# Altium PCB Micro+Complete+Ver1.1.pcbdoc
Units mil, origin at the board's own origin, x right, y up, seen from the top; angles counter-clockwise.
Board outline 4250 x 3000 mil, 2 copper layers (Top Layer, Bottom Layer); 43 components, 58 nets, 187 pads, 94 vias.
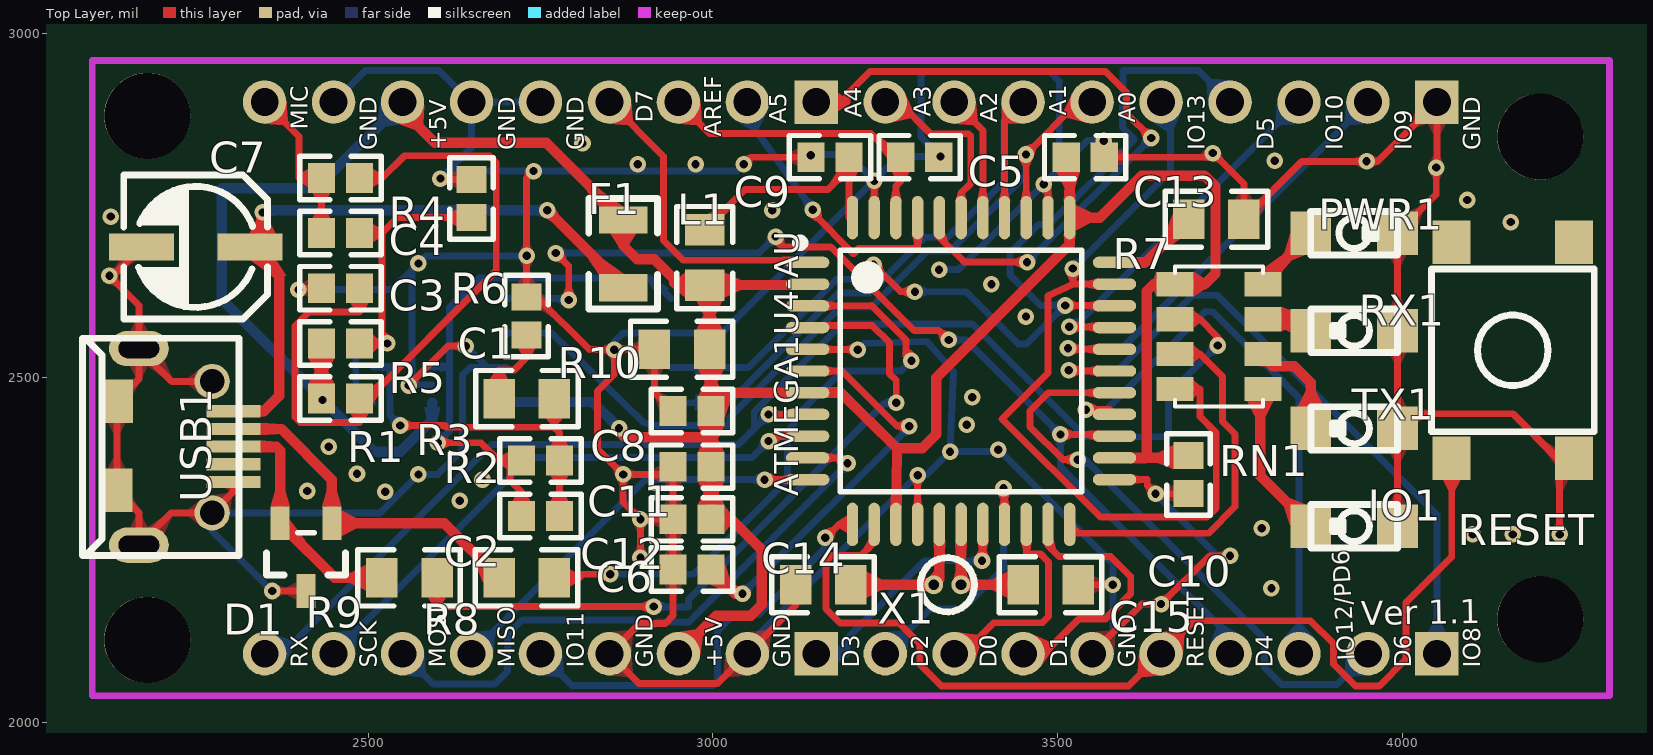
[diagram p0: Top Layer view]
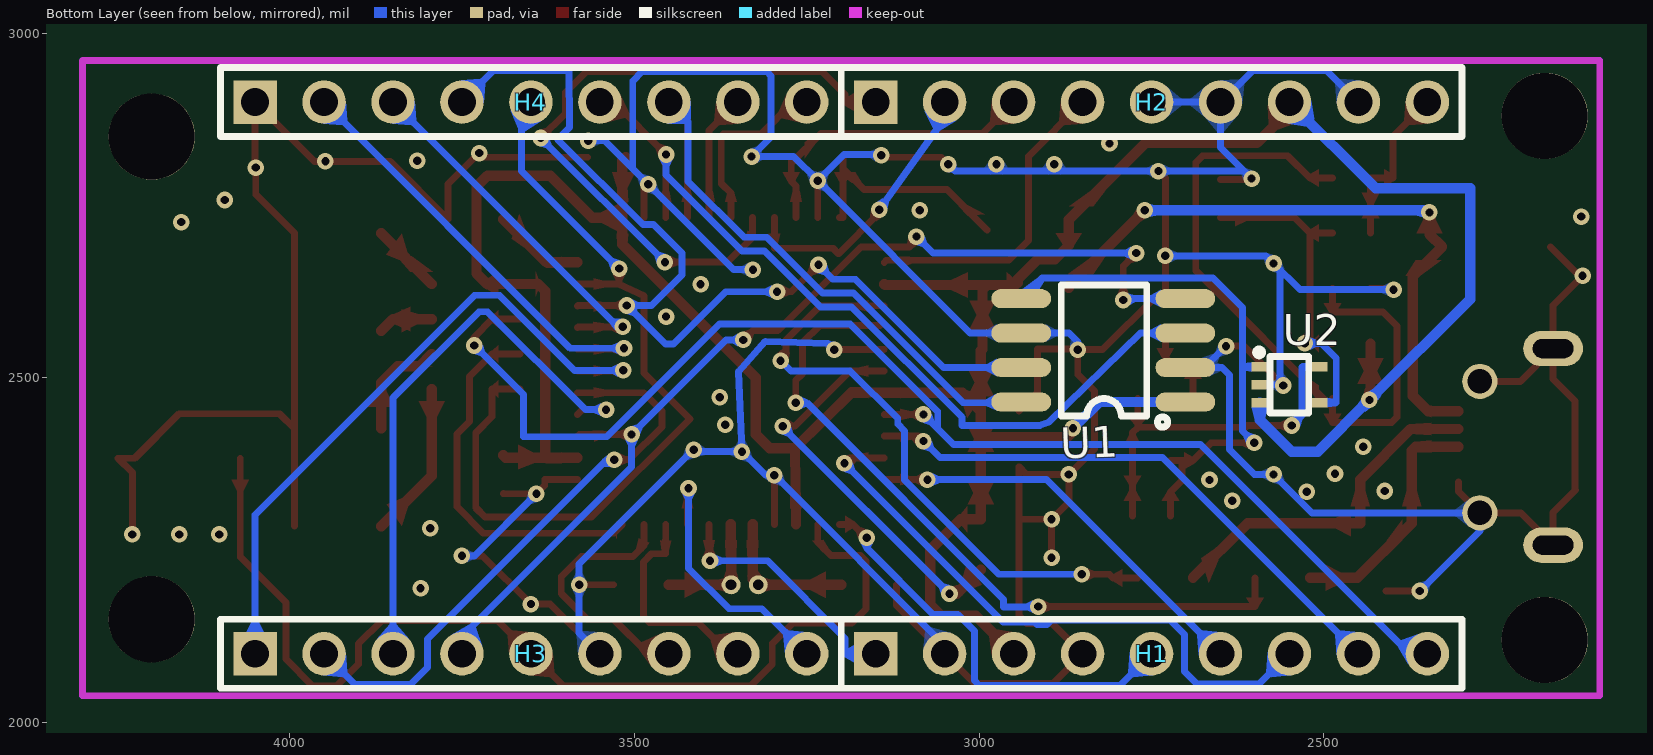
[diagram p1: Bottom Layer view, seen from below]

## Layer stack, top to bottom
Top Layer: signal copper (thickness not stored)
Dielectric: dielectric 12.6, FR-4, Dk 4.8
Bottom Layer: signal copper (thickness not stored)

## Board outline
5250,1000 1000,1000 1000,4000 5250,4000

## Components (designator, comment, footprint, x,y, rotation, side; value= is the part's Value field where it differs from the comment)
ATMEGA1U4-AU "ATMEGA32U4-AU" QFP-44_10X10X08P 3360,2510 r0 top
C1 "1uF" 0603 2730,2590 r90 top
C2 "100pF" 0603 2750,2300 r180 top
C3 "100nF" 0603 2460,2630 r0 top
C4 "10nF" 0603 2460,2710 r0 top
C5 "100nF" 0603 3300,2820 r180 top
C6 "1uF" 0603 2970,2222 r0 top
C7 "22uF" CAP-SMD_BD5.0-L5.3-W5.3-FD 2250,2690 r180 top
C8 "100nF" 0603 2970,2451.8 r0 top
C9 "1uF" 0603 3170,2820 r0 top
C10 "100nF" 0603 3690,2360 r90 top
C11 "100nF" 0603 2970,2371.2 r0 top
C12 "100nF" 0603 2970,2295 r0 top
C13 "100nF" 0603 3540,2820 r180 top
C14 "22pF" 0805 3160,2200 r0 top
C15 "22pF" 0805 3490,2200 r0 top
D1 "AZ5125-02S.R7G" SOT-23-3_L2.9-W1.6-P1.90-LS2.8-BR 2410,2240 r90 top
F1 "SMD1206P050TF/15" FUSE-1206 2870,2680 r90 top
H1 "A2541WV-9P" SIP-2.54MM-9P-CJT-H8.54 2750,2100 r180 bottom
H2 "A2541WV-9P" SIP-2.54MM-9P-CJT-H8.54 2750,2900 r180 bottom
H3 "A2541WV-9P" SIP-2.54MM-9P-CJT-H8.54 3650,2100 r180 bottom
H4 "A2541WV-9P" SIP-2.54MM-9P-CJT-H8.54 3650,2900 r180 bottom
IO1 "LTST-C21KGKT" LED-SMD-3.2X1.6X1.1 3930,2285 r180 top
L1 "30Ω" 0805 2988.31,2674.7 r90 top
PWR1 "LTST-C21TBKT" LED-SMD-3.2X1.6X1.1 3930,2710 r0 top
R1 "2K" 0603 2460,2470 r180 top
R2 "100K" 0603 2750,2380 r0 top
R3 "10K" 0805 2730,2470 r180 top
R4 "2K" 0603 2460,2790 r0 top
R5 "1M" 0603 2460,2550 r180 top
R6 "1M" 0603 2650,2760 r270 top
R7 "1K" 0805 3730,2730 r180 top
R8 "22" 0805 2730,2210 r0 top
R9 "22" 0805 2560,2210 r0 top
R10 "10K" 0805 2955.24,2541.64 r0 top
RESET "TSA063G50-250" SW-SMD-T6X6-9.5X5.8 4160,2540 r90 top
RN1 "1K" 1206_X4 3734,2560 r90 top
RX1 "LTST-C21KSKT" LED-SMD-3.2X1.6X1.1 3930,2568.39 r180 top
TX1 "LTST-C21KSKT" LED-SMD-3.2X1.6X1.1 3930,2426.69 r180 top
U1 "MSGEQ7SOIC" SOIC-8 2820,2540 r180 bottom
U2 "MAX4466EXK+T" SC-70-5 2550,2490 r90 bottom
USB1 "micro USBFemale" MICRO-USB-1 2220,2400 r180 top
X1 "16MHz" TXAL-1.9*6 3340,2200 r0 top

## Footprints (in the part's own frame and the unit in brackets; to place one, negate y for a bottom-side part, rotate by r counter-clockwise, add the part's x,y. Pads: shape width x height; smd on the part's side, far side on the other; paste and mask are expansions set on the pad)
0603 [mm]
  rect 1x1.1 smd: 1(-0.7,0) 2(0.7,0)
  silkscreen extent -1.5,-0.8 1.5,0.8
0805 [mm]
  rect 1.16x1.45 smd: 1(-1.016,0) 2(1.016,0)
  silkscreen extent -1.9,-1.03 1.87,1.04
1206_X4 [mm]
  rect 0.9x1.375 smd: 1(-1.933,-1.623) 2(-0.643,-1.623) 3(0.643,-1.623) 4(1.933,-1.623) 5(1.933,1.623) 6(0.643,1.623) 7(-0.643,1.623) 8(-1.933,1.623)
  silkscreen extent -2.58,-1.62 2.58,1.62
CAP-SMD_BD5.0-L5.3-W5.3-FD [mm]
  rect 2.4x1 smd: 1(-2,0) 2(2,0)
  silkscreen extent -2.65,-2.65 2.65,2.65
FUSE-1206 [mm]
  rect 1x1.801 smd: 1(-1.25,0) 2(1.25,0)
  silkscreen extent -2.03,-1.27 2.03,1.27
LED-SMD-3.2X1.6X1.1 [mm]
  rect 1.5x1.6 smd: 1(-1.6,0) 2(1.6,0)
  silkscreen extent -1.6,-0.8 1.6,0.8
MICRO-USB-1 [mm]
  round 1.3 hole 0.9: 0(-1.371,2.431) 0(-1.371,-2.41)
  oval 2.2x1.3 hole 0.7 slot 1.5 at 0 deg: 0(1.329,3.619) 0(1.329,-3.619)
  rect 1.2x1.6 smd: 0(2.14,-1.683) 0(2.156,1.596)
  rect 2x0.45 smd: 1(-2.156,-1.31) 2(-2.156,-0.66) 3(-2.156,-0.01) 4(-2.156,0.64) 5(-2.156,1.29)
  silkscreen extent -2.36,-4 3.4,4
QFP-44_10X10X08P [mm]
  oval 1.6x0.42 smd: 1(-5.65,4) 2(-5.65,3.2) 3(-5.65,2.4) 4(-5.65,1.6) 5(-5.65,0.8) 6(-5.65,0) 7(-5.65,-0.8) 8(-5.65,-1.6) 9(-5.65,-2.4) 10(-5.65,-3.2) 11(-5.65,-4) 23(5.65,-4) 24(5.65,-3.2) 25(5.65,-2.4) 26(5.65,-1.6) 27(5.65,-0.8) 28(5.65,0) 29(5.65,0.8) 30(5.65,1.6) 31(5.65,2.4) 32(5.65,3.2) 33(5.65,4)
  oval 0.42x1.6 smd: 12(-4,-5.65) 13(-3.2,-5.65) 14(-2.4,-5.65) 15(-1.6,-5.65) 16(-0.8,-5.65) 17(0,-5.65) 18(0.8,-5.65) 19(1.6,-5.65) 20(2.4,-5.65) 21(3.2,-5.65) 22(4,-5.65) 34(4,5.65) 35(3.2,5.65) 36(2.4,5.65) 37(1.6,5.65) 38(0.8,5.65) 39(0,5.65) 40(-0.8,5.65) 41(-1.6,5.65) 42(-2.4,5.65) 43(-3.2,5.65) 44(-4,5.65)
  silkscreen extent -6.08,-4.45 4.45,4.87
SC-70-5 [mil]
  rect 13.8x23.62 smd: 1(26,43) 2(0,43) 3(-26,43) 4(-26,-43) 5(26,-43)
  silkscreen extent -41,-28 52,49
SIP-2.54MM-9P-CJT-H8.54 [mm]
  rect 1.6x1.6 hole 1.02: 1(-10.16,0)
  round 1.6 hole 1.02: 2(-7.62,0) 3(-5.08,0) 4(-2.54,0) 5(0,0) 6(2.54,0) 7(5.08,0) 8(7.62,0) 9(10.16,0)
  silkscreen extent -11.43,-1.27 11.43,1.27
SOIC-8 [mm]
  oval 2.2x0.7 smd: 1(3.023,-1.905) 2(3.023,-0.635) 3(3.023,0.635) 4(3.023,1.905) 5(-3.023,1.905) 6(-3.023,0.635) 7(-3.023,-0.635) 8(-3.023,-1.905)
  silkscreen extent -1.55,-2.83 2.37,2.41
SOT-23-3_L2.9-W1.6-P1.90-LS2.8-BR [mm]
  rect 1.25x0.7 smd: 1(1.25,-0.95) 2(1.25,0.95) 3(-1.25,0)
  silkscreen extent -0.65,-1.46 0.9,1.46
SW-SMD-T6X6-9.5X5.8 [mm]
  rect 1.6x1.4 smd: 1(-3.975,2.249) 2(3.975,2.249) 3(-3.975,-2.249) 4(3.975,-2.249)
  silkscreen extent -3,-3 3,3
TXAL-1.9*6 [mm]
  round 0.7 hole 0.4: 1(-0.5,0) 2(0.5,0)
  silkscreen extent -1,-1 1,1

## Free pads (board coordinates)
  round 125 hole 125 unplated: ""(2180,2120) ""(2180,2880) ""(4200,2150) ""(4200,2850)

## Via types
v1: diameter 24, hole 12, Top Layer to Bottom Layer, 94 vias

## Nets (pads, with @x,y where several pads share a name; then routed paths per layer and width w, separated by ;. In a path a pad name is that pad's centre, name@x,y a point inside that pad or via, vN(x,y) a via of type N, cw(c..) or ccw(c..) an arc to the next point about the centre after c; other vN are vias at no path point)
+5V: ATMEGA1U4-AU.2 ATMEGA1U4-AU.7 ATMEGA1U4-AU.14 ATMEGA1U4-AU.24 ATMEGA1U4-AU.34 C8.2 C10.2 C11.2 C12.2 C13.2 F1.2 H1.3 H2.7 L1.1 R1.2 R5.2 R10.2 RN1.5 U1.1 U2.3 | length 4518.9
  Top Layer w15: R1.2@2432.5,2470 R5.2@2432.5,2550 ; H2.7 2550,2888 2597,2841 2758.2,2841 F1.2 2870,2692 2890,2672 2915,2672 2944,2643 2944,2638 2947.3,2634.7 L1.1 ; v1(2864,2427) 2872,2414 2997,2414 ; H1.3 3005,2155 3055,2155 3071,2171 3071,2251 3027,2295 C12.2 C11.2 C8.2@2997.5,2451.8 ; ATMEGA1U4-AU.2 3136.3,2634.7 L1.1 ; ATMEGA1U4-AU.14 3267,2398 ; C13.2 3517.5,2815 ATMEGA1U4-AU.34 ; ATMEGA1U4-AU.24 3686.5,2384 C10.2 ; 3626.1,2384 3629,2386.9 3629,2626 3639.1,2636.1 RN1.5 ; RN1.5@3666.1,2636.1 3713,2636 3729,2652 3729,2777 3713,2793 3622,2793 3561.4,2732.4 ATMEGA1U4-AU.34 ; L1.1 2995.2,2627.8 R10.2 2997.5,2539.3 C8.2@2997.5,2451.8 ; C8.2@2997.5,2451.8 3024.3,2478.5 ATMEGA1U4-AU.7 3185,2479 3267,2398 ; 3267,2398 3304,2398 3324,2418 3324,2500 3517.5,2693.5 ATMEGA1U4-AU.34
  Bottom Layer w15: H2.7 2425,2775 2288,2775 2288,2614 v1(2434,2468) 2509,2393 2547,2393 2593,2439 U2.3 ; U1.1 2826,2465 v1(2864,2427)
A0: ATMEGA1U4-AU.36 H4.6 U1.3 | length 1212.8
  Top Layer w10: ATMEGA1U4-AU.36 3454.5,2825 3529.5,2900 H4.6
  Bottom Layer w10: U1.3 2766,2565 2899,2436 2912,2431 3025,2431 3025,2443 3185,2603 3230,2603 3311,2684 3344,2684 3454,2794 v1(3454,2824)
A1: ATMEGA1U4-AU.37 H4.7 U1.8 | length 921.9
  Top Layer w10: ATMEGA1U4-AU.37 3423,2873 H4.7
  Bottom Layer w10: U1.8 2940,2464 3023.27,2464 3182.27,2623 3227.27,2623 3308.27,2704 3341.27,2704 3422,2784.73 3422,2872 H4.7
A2: ATMEGA1U4-AU.38 H4.8 | length 184.8
  Top Layer w10: H4.8 3391.5,2858.5 ATMEGA1U4-AU.38
A3: ATMEGA1U4-AU.39 H4.9 | length 270.1
  Top Layer w10: H4.9 3270,2900 3316,2854 3371,2854 3374,2851 3374,2782 3360,2768 ATMEGA1U4-AU.39 ; ATMEGA1U4-AU.39 ATMEGA1U4-AU.39@3361,2733.4
A4: ATMEGA1U4-AU.40 H2.1 | length 994.1
  Top Layer w10: H2.1 3194.6,2900 3194.6,2911.2 3228,2944.6 3569.6,2944.6 3600,2914.2 3600,2883.7 v1(3635.8,2847.9) ; ATMEGA1U4-AU.40 3328.5,2703.9 3364.6,2667.8 v1(3455.7,2667.8)
  Bottom Layer w10: v1(3455.7,2667.8) v1(3635.8,2847.9)
A5: ATMEGA1U4-AU.41 H2.2 | length 413.6
  Top Layer w10: v1(3145,2744) 3145,2739 3204,2680 3212,2688 3297,2688 ATMEGA1U4-AU.41
  Bottom Layer w10: H2.2 3062,2860 v1(3145,2744)
AREF: ATMEGA1U4-AU.42 C5.2 H2.3 | length 458.6
  Top Layer w10: H2.3 2995.3,2854.7 3229.4,2854.7 3272.5,2811.7 C5.2@3272.5,2802.6 ; ATMEGA1U4-AU.42 3265.5,2778.3 3272.5,2785.3 C5.2@3272.5,2802.6 ; C5.2@3272.5,2820 C5.2@3272.5,2802.6
AVCC: ATMEGA1U4-AU.44 C9.2 L1.2 | length 355
  Top Layer w10: L1.2 3046.6,2773 3167,2773 3197.5,2803.5 C9.2@3197.5,2820 ; C9.2 3197.6,2785.3 3197.6,2732.4 ATMEGA1U4-AU.44
D0/RX: ATMEGA1U4-AU.20 H3.8 | length 317.9
  Top Layer w10: H3.8 3363,2100 3408,2145 3478,2145 3487,2154 3487,2233 3475,2245 3455,2245 ATMEGA1U4-AU.20
D1/TXT: ATMEGA1U4-AU.21 H3.7 | length 386.5
  Top Layer w10: H3.7 3480,2100 3530,2150 3569,2150 3606,2187 3606,2212 3577,2241 3501.7,2241 3486,2256.7 ATMEGA1U4-AU.21
D2/SDA: ATMEGA1U4-AU.19 H3.9 | length 391.6
  Top Layer w10: v1(3421.5,2339.8) 3423,2338.2 ATMEGA1U4-AU.19
  Bottom Layer w10: H3.9 3315.3,2165.3 3363,2165.3 3421.5,2223.8 v1(3421.5,2339.8)
D3/SCL: ATMEGA1U4-AU.18 H1.1 | length 362.4
  Top Layer w10: v1(3390.3,2234.9) 3391.5,2236.1 ATMEGA1U4-AU.18
  Bottom Layer w10: H1.1 3194.6,2100 3194.6,2122.3 3307.2,2234.9 v1(3390.3,2234.9)
D4*: ATMEGA1U4-AU.25 H3.4 U1.4 | length 1540.5
  Top Layer w10: v1(2772,2681) 2791,2662 v1(2791,2613) ; v1(3091,2705) 3091,2700 3101,2690 3171,2690 3292,2569 3328,2569 v1(3342,2555) ; v1(3504,2418) 3579.9,2418 ATMEGA1U4-AU.25
  Bottom Layer w10: U1.4 2789,2615 v1(2791,2613) ; v1(2772,2681) 3067,2681 v1(3091,2705) ; v1(3342,2555) 3367,2555 v1(3504,2418) ; v1@3502.3,2408 3504,2409.7 v1(3504,2418) ; H3.4 3750,2125 3504,2371 v1(3504,2418)
D5*: ATMEGA1U4-AU.31 H4.4 U1.7 | length 1436.2
  Top Layer w10: v1(3233,2664) 3272,2625 v1(3293,2625) ; v1(3511,2605) 3581.9,2605 ATMEGA1U4-AU.31
  Bottom Layer w10: U1.7 3051.5,2515 3179.5,2643 3212,2643 v1(3233,2664) ; v1(3293,2625) 3367,2625 3443,2549 3455,2549 v1(3511,2605) 3475,2605 3431,2649 3431,2681 3472.51,2722.51 3487.68,2722.51 3611.16,2845.99 3594,2863.15 3594,2867 3594.7,2945.9 3704.1,2945.9 H4.4
D6*: ATMEGA1U4-AU.27 H3.2 | length 843.7
  Top Layer w10: v1(3529.1,2381.4) 3507.6,2381.4 3460,2429 3460,2452 3486.5,2478.5 ATMEGA1U4-AU.27
  Bottom Layer w10: v1(3529.1,2381.4) 3539.7,2381.4 3800,2121.1 3800,2080 3824.6,2055.4 3905.4,2055.4 H3.2
D7: ATMEGA1U4-AU.1 H2.4 | length 455.3
  Top Layer w10: H2.4 2928.6,2821.4 2928.6,2699.5 2957.4,2670.6 3134.4,2670.6 ATMEGA1U4-AU.1
D+: ATMEGA1U4-AU.4 R9.2 | length 1050.4
  Top Layer w10: R9.2 2600,2168.4 v1(2914.3,2168.4) ; ATMEGA1U4-AU.4@3143.6,2576 3231,2576 3256,2551 3256,2506 3266,2496 v1(3266,2464)
  Bottom Layer w10: v1(2914.3,2168.4) 2914.7,2168 2964.47,2168 2964.47,2178.47 3250,2464 v1(3266,2464)
D-: ATMEGA1U4-AU.3 R8.2 | length 891.2
  Top Layer w10: R8.2 2805.9,2210 2811.2,2215.2 v1(2851.2,2215.2) ; ATMEGA1U4-AU.3 3230,2605 3280,2555 3280,2533 v1(3288,2525)
  Bottom Layer w10: v1(2851.2,2215.2) 2971.2,2215.2 3108,2352 3108,2423 3118,2433 3118,2441 3187,2510 3273,2510 v1(3288,2525)
GND: ATMEGA1U4-AU.5 ATMEGA1U4-AU.15 ATMEGA1U4-AU.23 ATMEGA1U4-AU.35 ATMEGA1U4-AU.43 C1.2 C3.1 C5.1 C6.1 C7.2 C8.1 C9.1 C10.1 C11.1 C12.1 C13.1 C14.1 C15.2 D1.3 H1.2 H1.4 H2.5 H2.6 H2.8 H3.6 H4.1 IO1.1 PWR1.2 R6.1 R7.1 R10.1 RESET.3 RX1.1 TX1.1 U1.2 U1.6 U2.2 USB1.0 USB1.5 | length 10199.9
  Top Layer w10: C7.2 2129.26,2648 v1(2125,2648) 2167.69,2605.31 USB1.0@2167.69,2542.5 ; USB1.0@2273.99,2494.9 2215.29,2494.9 USB1.0@2167.69,2542.5 ; USB1.5 2304.88,2335.19 2273.99,2304.3 2214.49,2304.3 2167.69,2257.5 2167.69,2304.61 2135.12,2337.18 2135.76,2337.82 2135.76,2466.26 2167.69,2498.19 USB1.0@2167.69,2542.5 ; v1(2361,2191) 2409.8,2191 D1.3 ; v1(2399,2628) 2401,2630 C3.1 ; v1(2559,2489) 2616,2546 v1(2642,2546) ; v1(2605,2789) 2606.44,2787.56 R6.1 ; v1@2730,2667 C1.2 2744.44,2617.56 2821,2541 v1(2857,2541) ; v1(2730,2677) 2730,2790 v1(2740,2800) ; v1(2895,2239) v1(2895,2295) ; C8.1 2915.24,2479 R10.1 2857.64,2541.64 v1(2857,2541) ; v1(3045,2810) 3055,2820 C9.1 ; C14.1 3120,2170 H1.2 3007,2057 2893,2057 H1.4 2894,2144 2931,2144 2942.44,2155.44 C6.1 C12.1 ; ATMEGA1U4-AU.5 3138.06,2541 v1(3210,2541) ; ATMEGA1U4-AU.43@3234,2732.46 v1(3234,2786) ; ATMEGA1U4-AU.15 v1(3297,2359) ; v1(3480,2781) 3485.98,2775.02 ATMEGA1U4-AU.35 ; C15.2 v1(3580,2200) ; H3.6 3622,2172 v1(3650,2172) 3720,2242 v1(3750,2242) ; C13.1 3719,2820 v1(3725,2826) 3770,2781 R7.1 3854,2814 v1(3948,2814) 3964,2814 H4.1 4050,2806 v1(4049,2805) 4049,2766.01 PWR1.2 RX1.1 TX1.1 ; ATMEGA1U4-AU.23 3629.52,2352.52 3630,2353 3630,2344 v1(3642,2332) 3689.56,2332 C10.1 ; IO1.1 TX1.1 ; v1(4228,2273) 4228,2362.95 RESET.3 4224.51,2383.49 4160,2448 4014.3,2448 TX1.1 ; v1(2857,2541) 2857,2505 2833,2481 2833,2397 v1(2870,2360) ; v1(2870,2360) 2870,2320 v1(2895,2295) ; v1(2870,2360) 2931.24,2360 C11.1 C12.1 ; v1(2895,2295) C12.1
  Bottom Layer w10: v1(2361,2191) 2273.99,2278.01 2273.99,2304.3 2517.3,2304.3 v1(2573,2360) 2601,2360 2637,2396 2637,2504 2648,2515 U1.2 2673,2515 v1(2642,2546) ; v1(2399,2628) 2535,2628 v1(2573,2666) ; H2.8 2496,2946 2603,2946 2649,2900 H2.6 ; U2.2 2565,2490 2564,2489 2564,2657 v1(2573,2666) ; v1(2730,2677) 2584,2677 v1(2573,2666) ; H2.5 H2.6 ; v1(2857,2541) 2857,2552 2870,2565 U1.6 3013,2565 v1(3234,2786) ; v1(3045,2810) 3035,2800 v1(2740,2800) 2616,2800 v1(2605,2789) 2650,2834 H2.6 ; H1.2 3050,2112 v1(3297,2359) 3310,2359 v1(3344,2393) ; v1@3148.73,2824 3196,2824 v1(3234,2786) ; v1(3210,2541) 3219,2550 3310,2553 3349,2509 v1(3344,2393) ; v1(3328,2657) 3356,2657 v1(3480,2781) 3543,2844 v1(3567,2844) ; 3502.29,2803.29 3502.29,2930.71 3489,2944 3308,2944 3302,2938 3302,2849 v1(3330,2821) 3269,2821 v1(3234,2786) ; H3.6 3580,2130 v1(3580,2200) 3580,2230 v1(3414,2396) 3411,2393 v1(3344,2393) ; v1(3642,2332) 3732,2242 v1(3750,2242)
  other v1: 3810,2195 4102,2273 4160,2273 3796,2282 2633,2322 2525,2335 2412,2336 2666,2352 2484,2361 2443,2400 3368,2432 3376,2472 3454,2589 3404,2636 4157,2726 2127,2734 3086,2743 4094,2758 2891,2810 2975,2810 3815,2815 3142,2823 2811,2840
HWB: ATMEGA1U4-AU.33 R7.2 | length 133.5
  Top Layer w15: ATMEGA1U4-AU.33 3627.5,2667.5 R7.2
IO8: ATMEGA1U4-AU.28 H3.1 | length 979.3
  Top Layer w10: v1(3516,2511) 3517,2510 ATMEGA1U4-AU.28
  Bottom Layer w10: v1(3516,2511) 3586.6,2511 3695.4,2619.8 3731.8,2619.8 4050,2301.5 H3.1
IO9*: ATMEGA1U4-AU.29 H4.2 | length 650.9
  Top Layer w10: v1(3515,2543) 3516.5,2541.5 ATMEGA1U4-AU.29
  Bottom Layer w10: v1(3515,2543) 3593,2543 H4.2
IO10*: ATMEGA1U4-AU.30 H4.3 | length 533.8
  Top Layer w10: v1(3517,2574) 3581.4,2574 ATMEGA1U4-AU.30
  Bottom Layer w10: v1(3517,2574) 3524,2574 H4.3
IO11*: ATMEGA1U4-AU.12 H1.5 | length 619.3
  Top Layer w10: v1(3163,2268) 3182.6,2287.6 ATMEGA1U4-AU.12
  Bottom Layer w10: H1.5 2796,2054 3000,2054 3007,2061 3007,2133 3031,2157 3067,2157 3163,2253 v1(3163,2268)
IO12*/PD6: ATMEGA1U4-AU.26 H3.3 | length 834.9
  Top Layer w10: v1(3541,2454) 3575.4,2454 ATMEGA1U4-AU.26
  Bottom Layer w10: v1(3541,2454) 3571.1,2454 3713,2595.9 3725.3,2595.9 3850,2471.2 H3.3
IO13: ATMEGA1U4-AU.32 H4.5 RN1.8 | length 1231.8
  Top Layer w10: v1(3522.1,2658.6) 3522.1,2636 ; ATMEGA1U4-AU.32 3522.1,2636 ; RN1.8@3666.1,2483.9 3706.3,2483.9 3706.3,2443.7 3730,2420 3730,2311.7 3716.5,2298.1 3561.9,2298.1 3419.5,2440.5 3486,2507 3486,2619 3522.1,2636
  Bottom Layer w10: v1(3522.1,2658.6) 3663.5,2800 3663.5,2886.5 H4.5
MIC: C4.1 H2.9 R4.1 | length 243.3
  Top Layer w10: H2.9 2399.7,2850.3 2399.7,2790 R4.1 C4.1
MISO: ATMEGA1U4-AU.11 H1.6 | length 592.2
  Top Layer w10: v1(3075,2352.5) ATMEGA1U4-AU.11
  Bottom Layer w10: H1.6 2902.5,2352.5 v1(3075,2352.5)
MOSI: ATMEGA1U4-AU.10 H1.7 | length 894.7
  Top Layer w10: ATMEGA1U4-AU.10 3187.6,2384 v1(3195.4,2376.2)
  Bottom Layer w10: H1.7 2594,2056 2684,2056 2702,2074 2702,2128 2723,2149 2895,2149 2902,2142 2915.62,2142 2919.62,2146 2965.2,2146 v1(3195.4,2376.2)
null: 
R1_1: C3.2 R1.1 R4.2 | length 1053.2
  Top Layer w10: R1.1 R1.1@2487.6,2457.2 ; C3.2 2487.6,2595.3 2414.1,2595.3 2393.9,2575 2393.9,2443 2401.7,2435.3 2487.6,2435.3 R1.1@2487.6,2457.2 ; R4.2 2520.3,2790 2552.5,2822.1 2675.9,2822.1 2685.9,2812.2 2685.9,2655.5 R1.1@2487.6,2457.2
R3_2: C1.1 R3.2 | length 121.8
  Top Layer w10: R3.2 2690,2511.6 2712,2511.6 2730,2529.7 C1.1
R8_1: D1.1 R8.1 USB1.2 | length 511.7
  Top Layer w15: USB1.2 2374,2426 2447.4,2352.6 D1.1 2610.8,2289.2 R8.1
R9_1: D1.2 R9.1 USB1.3 | length 355.4
  Top Layer w15: USB1.3 2367,2400 2372.6,2394.4 D1.2 2451.8,2210 R9.1
RESET: ATMEGA1U4-AU.13 H3.5 RESET.1 | length 1512.5
  Top Layer w10: ATMEGA1U4-AU.13 3234,2261.2 3215.1,2242.3 3172.1,2242.3 3164.1,2234.2 3164.1,2165.2 3184.7,2144.6 3270.1,2144.6 3300,2114.7 3300,2084.8 3331.7,2053.1 3603.1,2053.1 H3.5 3697.8,2147.8 3866.7,2147.8 3900,2114.5 3900,2084.8 3931.7,2053.1 3966.4,2053.1 4005.4,2092.1 4005.4,2174.3 4071.5,2240.4 RESET.1@4071.5,2383.5
RN1_1: IO1.2 RN1.1 | length 229.2
  Top Layer w15: RN1.1@3793.9,2483.9 3793.9,2358.1 IO1.2
RN1_2: RN1.2 TX1.2 | length 156.7
  Top Layer w15: RN1.2@3793.9,2534.7 3811.6,2517 3843,2517 3867,2493 TX1.2
RN1_3: RN1.3 RX1.2 | length 80.1
  Top Layer w15: RN1.3@3793.9,2585.3 3850.1,2585.3 RX1.2
RN1_4: PWR1.1 RN1.4 | length 103.9
  Top Layer w15: RN1.4@3793.9,2636.1 PWR1.1
RX1: ATMEGA1U4-AU.8 H1.9 RN1.6 | length 1928.3
  Top Layer w10: v1(3080.8,2447) ATMEGA1U4-AU.8 ; RN1.6@3666.1,2585.3 3706.3,2585.3 3732,2559.6 v1(3732,2547)
  Bottom Layer w10: H1.9 2375.6,2100 2678.9,2403.3 3037,2403.3 3060.1,2426.4 ; v1(3080.8,2447) 3060.1,2426.4 ; v1(3732,2547) 3660.8,2475.8 3660.8,2414.6 3540.4,2414.6 3376.8,2578.2 3187,2578.2 3060.1,2451.3 3060.1,2426.4
S$29: 
S$31: 
S$67: 
S$69: 
S$80: 
S$82: 
S$84: 
S$86: 
SCK: ATMEGA1U4-AU.9 H1.8 | length 818.3
  Top Layer w10: v1(3080.8,2408.4) 3087.9,2415.5 ATMEGA1U4-AU.9
  Bottom Layer w10: H1.8 2734.3,2384.3 3056.7,2384.3 v1(3080.8,2408.4)
TX1: ATMEGA1U4-AU.22 RN1.7 | length 543.8
  Top Layer w10: ATMEGA1U4-AU.22 3530.3,2274.7 3718.7,2274.7 3757.2,2313.2 3757.2,2418.8 3739.1,2436.9 3739.1,2501.9 3706.3,2534.7 RN1.7@3666.1,2534.7
U1_5: C2.2 R2.1 U1.5 U2.1 | length 814.7
  Top Layer w10: v1(2601,2405.9) 2663.8,2405.9 2689.7,2380 R2.1 2706.1,2380 2706.1,2351.1 2722.5,2334.7 C2.2@2722.5,2300
  Bottom Layer w10: U2.1 2617.9,2516 ; v1(2601,2405.9) 2617.9,2422.8 2617.9,2516 ; U1.5 2908.9,2645.1 2660.9,2645.1 2617.9,2602.1 2617.9,2516
U2_4: C4.2 R5.1 R6.2 U2.4 | length 515.7
  Top Layer w10: R5.1 2515.8,2550 v1@2520.3,2550 ; C4.2 2520.3,2710 ; v1(2527.8,2550) v1@2520.3,2550 ; R6.2 2542.8,2732.4 2520.3,2710 ; v1@2520.3,2550 2520.3,2710
  Bottom Layer w10: U2.4 2482.1,2464 2482.1,2528.3 2503.8,2550 v1(2527.8,2550)
U2_5: C2.1 R2.2 R3.1 U2.5 | length 513.6
  Top Layer w10: v1(2546.7,2431) 2611.4,2431 2614,2428.4 2770,2428.4 ; R3.1 2770,2432.9 2770,2428.4 ; C2.1 2777.6,2345.3 R2.2 2777.6,2420.8 2770,2428.4
  Bottom Layer w10: U2.5 2531.9,2516 2531.9,2445.8 v1(2546.7,2431)
UCAP: ATMEGA1U4-AU.6 C6.2 | length 583.7
  Top Layer w10: ATMEGA1U4-AU.6 3187,2510 3267,2430 v1(3285,2430)
  Top Layer w15: C6.2 3032.6,2187 v1(3043,2187)
  Bottom Layer w10: v1(3043,2187) 3285,2429 v1(3285,2430)
USB1_1: C7.1 F1.1 USB1.1 | length 938.5
  Top Layer w15: USB1.1 2348.6,2451.6 2371,2474 2371,2647.7 C7.1 2347,2708.3 v1(2347,2740) ; v1(2760,2743) 2870,2633 F1.1
  Bottom Layer w15: v1(2347,2740) 2350,2743 v1(2760,2743)
XTAL1: ATMEGA1U4-AU.17 C15.1 X1.2 | length 177.9
  Top Layer w15: ATMEGA1U4-AU.17 X1.2 C15.1
XTAL2: ATMEGA1U4-AU.16 C14.2 X1.1 | length 211.3
  Top Layer w15: C14.2 X1.1 3328.5,2208.2 ATMEGA1U4-AU.16
pads on no net: RESET.2 RESET.4 USB1.4

## Polygon pours and split planes (outlines as drawn)
GND on Top Layer (solid): 1750,3250 4500,3250 4500,1750 1750,1750
GND on Bottom Layer (solid): 1500,3500 4750,3500 4750,1500 1500,1500

## Other copper
Top Layer:
  region net XTAL2: 3314.99,2212.72 3333.58,2203.68 3336,2213.23 3321,2220.52
  region net XTAL2: 3311.18,2189.66 3311.18,2210.34 3301.54,2207.5 3301.54,2192.5
  region net XTAL1: 3370.07,2209.08 3349.4,2209.15 3352.27,2218.79 3367.27,2218.74
  region net XTAL1: 3368.82,2189.66 3368.82,2210.34 3378.46,2207.5 3378.46,2192.5
  region net A0: 3541.23,2869.75 3521.08,2912.48 3508.95,2886.52 3513.48,2876.91
  region net A1: 3418.57,2901.97 3451.97,2868.57 3426.53,2869.46 3419.46,2876.54
  region net A2: 3348.03,2868.57 3381.43,2901.97 3383.86,2873.21 3376.79,2866.14
  region net A3: 3279.02,2912.23 3258.51,2869.67 3286.32,2876.61 3290.92,2886.15
  region net AREF: 2948.03,2868.57 2981.43,2901.97 2983.86,2873.21 2976.79,2866.14
  region net D7: 2848.03,2868.57 2881.43,2901.97 2883.86,2873.21 2876.79,2866.14
  region net +5V: 2581.2,2895.71 2541.85,2869.58 2567.35,2860.05 2580.1,2868.51
  region net MIC: 2348.03,2868.57 2381.43,2901.97 2383.86,2873.21 2376.79,2866.14
  region net +5V: 2948.03,2131.43 2981.43,2098.03 2985.62,2125.02 2975.02,2135.62
  region net RESET: 3618.57,2101.97 3651.97,2068.57 3623.21,2066.14 3616.14,2073.21
  region net RESET: 3648.03,2131.43 3681.43,2098.03 3683.86,2126.79 3676.78,2133.86
  region net D1/TXT: 3476.34,2082.74 3463.84,2128.29 3489.83,2116.9 3492.87,2105.8
  region net D0/RX: 3380.28,2091.34 3354.81,2131.13 3383.36,2127.43 3388.87,2118.81
  region net IO9*: 3523.73,2551.23 3522.08,2533.31 3530.81,2536.5 3531.73,2546.5
  region net IO10*: 3524.94,2565 3524.94,2583 3533.34,2579 3533.34,2569
  region net D5*: 3518.94,2596 3518.94,2614 3527.34,2610 3527.34,2600
  region net IO13: 3513.1,2650.66 3531.1,2650.66 3527.1,2642.26 3517.1,2642.26
  region net A4: 3636.55,2859.88 3623.82,2847.15 3620.71,2855.92 3627.78,2862.99
  region net A4: 3447.76,2658.8 3447.76,2676.8 3439.36,2672.8 3439.36,2662.8
  region net A5: 3141.67,2732.47 3156.86,2742.14 3158.1,2732.97 3149.46,2727.47
  region net D3/SCL: 3399.86,2242.15 3381.91,2243.48 3386.5,2251.56 3396.5,2250.82
  region net MISO: 3082.94,2343.5 3082.94,2361.5 3091.34,2357.5 3091.34,2347.5
  region net MOSI: 3192.72,2387.9 3184.13,2372.08 3178.33,2379 3183.76,2389
  region net RX1: 3723,2554.94 3741,2554.94 3737,2559.6 3727,2559.6
  region net RX1: 3088.74,2438 3088.74,2456 3097.14,2452 3097.14,2442
  region net IO8: 3524.47,2519.5 3523.37,2501.53 3532,2505 3532.61,2515
  region net D6*: 3521.16,2372.4 3521.16,2390.4 3512.76,2386.4 3512.76,2376.4
  region net IO12*/PD6: 3548.94,2445 3548.94,2463 3557.34,2459 3557.34,2449
  region net D4*: 3511.94,2409 3511.94,2427 3520.34,2423 3520.34,2413
  region net D2/SDA: 3431.19,2332.72 3413.27,2331.07 3418,2323.07 3428,2323.99
  region net U2_4: 2516.16,2552.92 2532.15,2561.18 2525.3,2567.1 2515.3,2561.93
  region net U2_4: 2519.86,2541 2519.86,2559 2511.46,2555 2511.46,2545
  region net U2_5: 2554.64,2422 2554.64,2440 2563.04,2436 2563.04,2426
  region net D-: 2843.26,2206.2 2843.26,2224.2 2834.86,2220.2 2834.86,2210.2
  region net D+: 2906.36,2159.4 2906.36,2177.4 2897.96,2173.4 2897.96,2163.4
  region net U1_5: 2608.94,2396.9 2608.94,2414.9 2617.34,2410.9 2617.34,2400.9
  region net D-: 3276.26,2527.51 3291.96,2536.33 3285,2542.05 3275,2536.44
  region net UCAP: 3277.06,2421 3277.06,2439 3268.66,2435 3268.66,2425
  region net USB1_1: 2771.98,2743.75 2759.25,2731.02 2766.25,2726.14 2776.86,2736.75
  region net USB1_1: 2338,2732.06 2356,2732.06 2354.5,2723.66 2339.5,2723.66
  region net +5V: 2442.23,2476.73 2424.31,2475.08 2425,2483.58 2440,2484.96
  region net +5V: 2875.82,2424.96 2860.5,2415.52 2865.62,2410.07 2878.39,2417.93
  region net SCK: 3091.86,2403.74 3084.04,2419.96 3093.1,2420.5 3097.93,2410.5
  region net UCAP: 3038.26,2198.02 3032.66,2180.92 3024.86,2184.1 3030.09,2200.07
  region net D4*: 3342.75,2566.98 3330.03,2554.25 3326.91,2563.02 3333.99,2570.09
  region net D4*: 3087.68,2693.47 3102.86,2703.14 3104.1,2693.97 3095.46,2688.47
  region net D4*: 2783.98,2681.75 2771.25,2669.02 2780.02,2665.91 2787.09,2672.98
  region net D4*: 2782,2620.94 2800,2620.94 2796,2629.34 2786,2629.34
  region net IO11*: 3174.98,2267.25 3162.25,2279.98 3171.02,2283.09 3178.09,2276.02
  region net D5*: 3285.06,2616 3285.06,2634 3276.66,2630 3276.66,2620
  region net A0: 3463.24,2816.34 3445.25,2815.79 3449.5,2807.52 3459.5,2807.82
  region net A0: 3465.99,2823.51 3452.99,2835.96 3461.69,2839.26 3468.91,2832.34
  region net D5*: 3244.97,2664.75 3232.25,2652.02 3241.02,2648.91 3248.09,2655.98
  region net MIC: 2412.8,2777.5 2412.8,2802.5 2399.7,2795 2399.7,2785
  region net MIC: 2444.9,2768.3 2419.9,2768.3 2427.4,2753.3 2437.4,2753.3
  region net R1_1: 2507.2,2802.5 2507.2,2777.5 2520.3,2785 2520.3,2795
  region net U2_4: 2628.3,2719.9 2628.3,2744.9 2613.3,2737.4 2613.3,2727.4
  region net U2_4: 2507.2,2562.5 2507.2,2537.5 2515.8,2545 2515.8,2555
  region net +5V: 2451.25,2528.3 2413.75,2528.3 2425,2505.8 2440,2505.8
  region net U2_5: 2782.5,2441.5 2757.5,2441.5 2765,2432.9 2775,2432.9
  region net R3_2: 2677.5,2498.5 2702.5,2498.5 2695,2511.6 2685,2511.6
  region net +5V: 2976.49,2570.2 3013.99,2570.2 3002.74,2592.7 2987.74,2592.7
  region net +5V: 3016.3,2513.1 2978.8,2513.1 2990.05,2490.6 3005.05,2490.6
  region net R8_1: 2667.2,2202.59 2678,2238.5 2658.58,2252.03 2653.67,2235.72
  region net D-: 2792.8,2222.5 2792.8,2197.5 2805.9,2205 2805.9,2215
  region net R9_1: 2497.2,2191.25 2497.2,2228.75 2474.7,2217.5 2474.7,2202.5
  region net D+: 2612.5,2181.5 2587.5,2181.5 2595,2168.4 2605,2168.4
  region net U2_5: 2765.1,2321.7 2790.1,2321.7 2782.6,2336.7 2772.6,2336.7
  region net U1_5: 2710,2321.7 2735,2321.7 2727.5,2334.7 2717.5,2334.7
  region net +5V: 3532.1,2798.3 3498.75,2798.3 3510,2775.8 3525,2775.8
  region net +5V: 2978.81,2392.9 3016.31,2392.9 3005.05,2415.4 2990.05,2415.4
  region net +5V: 3016.31,2349.5 2978.81,2349.5 2990.06,2327 3005.06,2327
  region net +5V: 3668.3,2367.9 3668.3,2402.75 3645.8,2391.5 3645.8,2376.5
  region net XTAL1: 3427.2,2181.25 3427.2,2218.75 3404.7,2207.5 3404.7,2192.5
  region net XTAL2: 3222.8,2218.75 3222.8,2181.25 3245.3,2192.5 3245.3,2207.5
  region net HWB: 3678,2701.5 3667.2,2737.41 3653.67,2704.28 3658.57,2687.97
  region net RN1_1: 3837.5,2285.55 3858.68,2316.5 3837.39,2325.23 3828.77,2312.64
  region net +5V: 3017.2,2313.75 3017.2,2276.25 3027,2287.5 3027,2302.5
  region net +5V: 2978.81,2316.7 3016.31,2316.7 3005.06,2339.2 2990.06,2339.2
  region net USB1_1: 2834.6,2650.5 2871.25,2650.5 2840.61,2673 2819.39,2673
  region net +5V: 2834.6,2748.9 2869.06,2748.9 2838.42,2771.4 2817.2,2771.4
  region net +5V: 2888.75,2709.5 2851.25,2709.5 2862.5,2692 2877.5,2692
  region net USB1_1: 2367.19,2670.3 2329.69,2670.3 2360.33,2647.8 2381.55,2647.8
  region net USB1_1: 2328.25,2709.7 2365.75,2709.7 2354.5,2732.2 2339.5,2732.2
  region net +5V: 2978.8,2473.5 3016.3,2473.5 3005.05,2496 2990.05,2496
  region net +5V: 3016.3,2430.1 2978.8,2430.1 2990.06,2407.6 3005.06,2407.6
  region net +5V: 2996.22,2473.5 3017.2,2442.42 3026,2469.6 3017.45,2482.27
  region net R9_1: 2358.8,2313.8 2386.4,2313.8 2380.1,2336.3 2365.1,2336.3
  region net R9_1: 2386.4,2294.15 2386.4,2264.6 2408.9,2242.29 2408.9,2263.51
  region net R8_1: 2433.6,2313.8 2461.2,2313.8 2454.9,2336.3 2439.9,2336.3
  region net R8_1: 2461.2,2307.95 2461.2,2270.45 2483.7,2281.7 2483.7,2296.7
  region net RN1_3: 3837.5,2566.55 3837.5,2599.9 3815,2592.8 3815,2577.8
  region net RN1_2: 3848.26,2458.2 3885.76,2458.2 3874.51,2480.7 3859.51,2480.7
  region net R9_1: 2344.3,2409.3 2344.3,2391.6 2366.8,2392.5 2366.8,2407.5
  region net R8_1: 2344.3,2434.9 2344.3,2417.1 2366.8,2418.5 2366.8,2433.5
  region net USB1_1: 2344.3,2460.4 2344.3,2442.7 2348.59,2444.09 2348.59,2459.09
  region net RN1_4: 3859.44,2678.5 3837.5,2708.91 3829,2682.24 3837.9,2669.91
  region net R3_2: 2742.5,2542.8 2717.5,2542.8 2725,2529.7 2735,2529.7
  region net MIC: 2419.9,2731.7 2444.9,2731.7 2437.4,2746.7 2427.4,2746.7
  region net U2_4: 2507.2,2722.5 2507.2,2697.5 2520.3,2705 2520.3,2715
  region net U1_5: 2702.8,2367.5 2702.8,2392.5 2689.7,2385 2689.7,2375
  region net U2_5: 2765.1,2401.7 2790.1,2401.7 2782.6,2416.7 2772.6,2416.7
  region net U2_5: 2790.1,2358.3 2765.1,2358.3 2772.6,2345.3 2782.6,2345.3
  region net R1_1: 2507.2,2489.3 2507.2,2464.3 2522.2,2484.73 2522.2,2498.87
  region net R1_1: 2500.1,2448.3 2475.1,2448.3 2482.6,2435.3 2492.6,2435.3
  region net +5V: 2413.75,2491.7 2451.25,2491.7 2440,2514.2 2425,2514.2
  region net R1_1: 2500.1,2608.3 2475.1,2608.3 2482.6,2595.3 2492.6,2595.3
  region net AREF: 3252.8,2818.86 3252.8,2841.7 3237.8,2853.38 3237.8,2839.26
  region net AREF: 3285,2798.3 3260,2798.3 3267.5,2785.3 3277.5,2785.3
  region net AVCC: 3210.1,2798.3 3185.1,2798.3 3192.6,2785.3 3202.6,2785.3
  region net AVCC: 3204.8,2798.3 3179.8,2798.3 3170.23,2783.3 3184.37,2783.3
  region net +5V: 3016.9,2653.45 3016.9,2615.95 3039.4,2627.2 3039.4,2642.2
  region net +5V: 3013.99,2611.9 2976.49,2611.9 2987.74,2589.4 3002.74,2589.4
  region net +5V: 2959.8,2615.95 2959.8,2653.45 2947.3,2642.2 2947.3,2627.2
  region net AVCC: 2992.02,2737.5 3016.9,2735.02 3029.52,2748.84 3016.66,2750.12
  region net RN1_1: 3812.65,2466.2 3775.15,2466.2 3786.4,2443.7 3801.4,2443.7
  region net RN1_2: 3792.85,2517 3816.9,2522.3 3800.99,2517 3825,2517 3800.99,2517 3792.85,2517
  region net RN1_3: 3825,2603 3825,2567.6 3847.5,2577.8 3847.5,2592.8
  region net RN1_4: 3792.66,2653.8 3825,2653.8 3844.22,2676.3 3823.12,2676.3
  region net +5V: 3697.2,2653.8 3697.2,2618.4 3712.98,2628.5 3713,2643.5
  region net +5V: 3643,2618.4 3643,2653.8 3639.1,2643.6 3639.1,2628.6
  region net RX1: 3697.2,2597.8 3697.2,2572.8 3706.3,2580.3 3706.3,2590.3
  region net TX1: 3697.2,2547.2 3697.2,2522.2 3706.3,2529.7 3706.3,2539.7
  region net IO13: 3697.2,2496.4 3697.2,2471.4 3706.3,2478.9 3706.3,2488.9
  region net UCAP: 3017.2,2231.39 2996.23,2200.3 3017.44,2191.51 3025.99,2204.18
  region net RESET: 4084,2352 4059,2352 4066.5,2337 4076.5,2337
  region net MIC: 2412.75,2777.5 2412.75,2802.5 2399.7,2795 2399.7,2785
  region net MIC: 2444.9,2768.35 2419.9,2768.35 2427.4,2753.35 2437.4,2753.35
  region net R1_1: 2507.24,2802.5 2507.24,2777.5 2520.3,2785 2520.3,2795
  region net U2_4: 2628.35,2719.9 2628.35,2744.9 2613.35,2737.4 2613.35,2727.4
  region net U2_4: 2507.25,2562.5 2507.25,2537.5 2515.8,2545 2515.8,2555
  region net +5V: 2451.25,2528.35 2413.75,2528.35 2425,2505.85 2440,2505.85
  region net U2_5: 2782.5,2441.46 2757.5,2441.46 2765,2432.9 2775,2432.9
  region net R3_2: 2677.5,2498.54 2702.5,2498.54 2695,2511.6 2685,2511.6
  region net +5V: 2976.49,2570.18 3013.99,2570.18 3002.74,2592.68 2987.74,2592.68
  region net +5V: 3016.3,2513.1 2978.8,2513.1 2990.05,2490.6 3005.05,2490.6
  region net R8_1: 2667.17,2202.63 2677.95,2238.54 2658.52,2252.08 2653.62,2235.77
  region net D-: 2792.83,2222.5 2792.83,2197.5 2805.9,2205 2805.9,2215
  region net R9_1: 2497.17,2191.25 2497.17,2228.75 2474.67,2217.5 2474.67,2202.5
  region net D+: 2612.5,2181.46 2587.5,2181.46 2595,2168.4 2605,2168.4
  region net U2_5: 2765.1,2321.65 2790.1,2321.65 2782.6,2336.65 2772.6,2336.65
  region net U1_5: 2710,2321.65 2735,2321.65 2727.5,2334.7 2717.5,2334.7
  region net +5V: 3532.13,2798.35 3498.75,2798.35 3510,2775.85 3525,2775.85
  region net +5V: 2978.81,2392.85 3016.31,2392.85 3005.05,2415.35 2990.05,2415.35
  region net +5V: 3016.31,2349.55 2978.81,2349.55 2990.06,2327.05 3005.06,2327.05
  region net +5V: 3668.34,2367.87 3668.34,2402.75 3645.84,2391.5 3645.84,2376.5
  region net XTAL1: 3427.16,2181.25 3427.16,2218.75 3404.66,2207.5 3404.66,2192.5
  region net XTAL2: 3222.84,2218.75 3222.84,2181.25 3245.34,2192.5 3245.34,2207.5
  region net HWB: 3677.95,2701.46 3667.16,2737.37 3653.63,2704.23 3658.53,2687.92
  region net RN1_1: 3837.48,2285.59 3858.72,2316.5 3837.41,2325.21 3828.77,2312.64
  region net +5V: 3017.2,2313.75 3017.2,2276.25 3027,2287.5 3027,2302.5
  region net +5V: 2978.81,2316.7 3016.31,2316.7 3005.06,2339.2 2990.06,2339.2
  region net USB1_1: 2834.55,2650.47 2871.28,2650.47 2840.63,2672.97 2819.42,2672.97
  region net +5V: 2834.55,2748.9 2869.06,2748.9 2838.42,2771.4 2817.2,2771.4
  region net +5V: 2888.75,2709.53 2851.25,2709.53 2862.5,2692 2877.5,2692
  region net USB1_1: 2367.18,2670.31 2329.68,2670.31 2360.32,2647.81 2381.53,2647.81
  region net USB1_1: 2328.25,2709.69 2365.75,2709.69 2354.5,2732.19 2339.5,2732.19
  region net +5V: 2978.8,2473.45 3016.3,2473.45 3005.05,2495.95 2990.05,2495.95
  region net +5V: 3016.3,2430.14 2978.8,2430.14 2990.06,2407.64 3005.06,2407.64
  region net +5V: 2996.01,2473.45 3017.24,2442.54 3025.97,2469.58 3017.33,2482.15
  region net R9_1: 2358.82,2313.81 2386.38,2313.81 2380.1,2336.31 2365.1,2336.31
  region net R9_1: 2386.38,2294.17 2386.38,2264.59 2408.88,2242.31 2408.88,2263.53
  region net R8_1: 2433.62,2313.81 2461.18,2313.81 2454.9,2336.31 2439.9,2336.31
  region net R8_1: 2461.18,2307.95 2461.18,2270.45 2483.68,2281.7 2483.68,2296.7
  region net RN1_3: 3837.48,2566.55 3837.48,2599.88 3814.98,2592.8 3814.98,2577.8
  region net RN1_2: 3848.26,2458.19 3885.76,2458.19 3874.51,2480.69 3859.51,2480.69
  region net R9_1: 2344.25,2409.27 2344.25,2391.55 2366.75,2392.5 2366.75,2407.5
  region net R8_1: 2344.25,2434.86 2344.25,2417.14 2366.75,2418.5 2366.75,2433.5
  region net USB1_1: 2344.25,2460.45 2344.25,2442.73 2348.59,2444.09 2348.59,2459.09
  region net RN1_4: 3859.48,2678.5 3837.48,2708.87 3828.99,2682.24 3837.91,2669.93
  region net R3_2: 2742.5,2542.75 2717.5,2542.75 2725,2529.7 2735,2529.7
  region net MIC: 2419.9,2731.65 2444.9,2731.65 2437.4,2746.65 2427.4,2746.65
  region net U2_4: 2507.24,2722.5 2507.24,2697.5 2520.3,2705 2520.3,2715
  region net U1_5: 2702.75,2367.5 2702.75,2392.5 2689.7,2385 2689.7,2375
  region net U2_5: 2765.1,2401.65 2790.1,2401.65 2782.6,2416.65 2772.6,2416.65
  region net U2_5: 2790.1,2358.35 2765.1,2358.35 2772.6,2345.3 2782.6,2345.3
  region net R1_1: 2507.25,2489.35 2507.25,2464.35 2522.25,2484.78 2522.25,2498.92
  region net R1_1: 2500.1,2448.35 2475.1,2448.35 2482.6,2435.3 2492.6,2435.3
  region net +5V: 2413.75,2491.65 2451.25,2491.65 2440,2514.15 2425,2514.15
  region net R1_1: 2500.1,2608.35 2475.1,2608.35 2482.6,2595.3 2492.6,2595.3
  region net AREF: 3252.76,2818.89 3252.76,2841.65 3237.76,2853.42 3237.76,2839.3
  region net AREF: 3285,2798.35 3260,2798.35 3267.5,2785.3 3277.5,2785.3
  region net AVCC: 3210.1,2798.35 3185.1,2798.35 3192.6,2785.3 3202.6,2785.3
  region net AVCC: 3204.85,2798.35 3179.85,2798.35 3170.28,2783.35 3184.42,2783.35
  region net +5V: 3016.85,2653.45 3016.85,2615.95 3039.35,2627.2 3039.35,2642.2
  region net +5V: 3013.99,2611.87 2976.49,2611.87 2987.74,2589.37 3002.74,2589.37
  region net +5V: 2959.77,2615.95 2959.77,2653.45 2947.3,2642.2 2947.3,2627.2
  region net AVCC: 2991.99,2737.53 3016.85,2734.88 3029.32,2748.64 3016.54,2750
  region net RN1_1: 3812.65,2466.2 3775.15,2466.2 3786.4,2443.7 3801.4,2443.7
  region net RN1_2: 3792.85,2517 3816.9,2522.3 3800.99,2517 3825,2517 3800.99,2517 3792.85,2517
  region net RN1_3: 3825,2603 3825,2567.6 3847.5,2577.8 3847.5,2592.8
  region net RN1_4: 3792.66,2653.8 3825,2653.8 3844.22,2676.3 3823.12,2676.3
  region net +5V: 3697.2,2653.8 3697.2,2618.4 3712.98,2628.5 3713,2643.5
  region net +5V: 3643,2618.4 3643,2653.8 3639.1,2643.6 3639.1,2628.6
  region net RX1: 3697.17,2597.8 3697.17,2572.8 3706.3,2580.3 3706.3,2590.3
  region net TX1: 3697.17,2547.2 3697.17,2522.2 3706.3,2529.7 3706.3,2539.7
  region net IO13: 3697.17,2496.4 3697.17,2471.4 3706.3,2478.9 3706.3,2488.9
  region net UCAP: 3017.24,2231.26 2996.02,2200.35 3017.33,2191.63 3025.96,2204.21
  region net RESET: 4084,2351.99 4059,2351.99 4066.5,2336.99 4076.5,2336.99
  region net A4: 3181.5,2887.5 3181.5,2912.5 3194.6,2905 3194.6,2895
  region net D7: 3116.05,2675.57 3112.61,2659.39 3098.6,2665.6 3100.72,2675.6
  region net D-: 3160.91,2596.22 3160.67,2612.76 3175.71,2609.71 3175.86,2599.71
  region net UCAP: 3160.79,2501.73 3160.79,2518.27 3175.79,2515 3175.79,2505
  region net +5V: 3114.33,2470.23 3114.33,2486.77 3091.83,2486 3091.83,2471
  region net +5V: 3160.97,2470.24 3160.61,2486.77 3183.12,2486.48 3183.44,2471.48
  region net RX1: 3114.34,2438.74 3114.33,2455.28 3099.33,2452 3099.33,2442
  region net SCK: 3114.34,2407.24 3114.33,2423.78 3099.33,2420.5 3099.33,2410.5
  region net MOSI: 3160.8,2392.29 3160.78,2375.75 3175.78,2379 3175.8,2389
  region net MISO: 3114.34,2344.25 3114.32,2360.79 3099.32,2357.5 3099.34,2347.5
  region net IO11*: 3194.25,2275.1 3194.25,2300.1 3182.6,2292.6 3182.6,2282.6
  region net RESET: 3242.25,2263.54 3225.75,2265.13 3218,2252.27 3227.13,2247.26
  region net +5V: 3273.77,2310.56 3257.24,2311.01 3258.62,2333.48 3273.62,2333.08
  region net XTAL2: 3336.77,2264.33 3320.23,2264.33 3321,2241.83 3336,2241.83
  region net XTAL1: 3368.27,2264.27 3351.73,2264.39 3352.34,2241.88 3367.34,2241.78
  region net D3/SCL: 3399.77,2264.33 3383.23,2264.33 3386.5,2249.33 3396.5,2249.33
  region net D2/SDA: 3431.26,2310.78 3414.72,2310.79 3418,2325.79 3428,2325.79
  region net D0/RX: 3462.76,2264.58 3446.23,2264.08 3449.95,2249.19 3459.95,2249.49
  region net D1/TXT: 3493.54,2267.69 3478.43,2260.97 3487.18,2248.45 3496.97,2252.8
  region net TX1: 3525.75,2291.79 3525.75,2266.79 3530.3,2281.8 3526.75,2271.18
  region net +5V: 3605.68,2392.29 3605.66,2375.75 3628.16,2376.5 3628.18,2391.5
  region net D4*: 3560.59,2423.66 3557.84,2407.36 3543.58,2413 3545.26,2423
  region net D6*: 3559.21,2470.23 3559.21,2486.77 3544.21,2483.5 3544.21,2473.5
  region net IO8: 3559.21,2501.73 3559.21,2518.27 3544.21,2515 3544.21,2505
  region net IO9*: 3559.21,2533.23 3559.21,2549.77 3544.21,2546.5 3544.21,2536.5
  region net IO10*: 3559.77,2581.24 3558.66,2564.74 3543.91,2569 3544.58,2579
  region net D5*: 3559.5,2612.75 3558.93,2596.23 3544.05,2600 3544.39,2610
  region net IO13: 3559.23,2644.25 3559.2,2627.71 3544.21,2631 3544.22,2641
  region net HWB: 3605.68,2659.21 3605.66,2675.75 3627.49,2675 3627.51,2660
  region net +5V: 3525.75,2755.66 3509.21,2755.68 3510,2778.18 3525,2778.16
  region net +5V: 3525.75,2751.15 3525.75,2713.65 3548.25,2724.9 3548.25,2739.9
  region net +5V: 3525.75,2709.22 3509.21,2709.2 3510,2693.49 3525,2693.51
  region net A0: 3462.76,2755.66 3446.22,2755.67 3449.5,2770.67 3459.5,2770.67
  region net A1: 3431.26,2755.66 3414.72,2755.67 3418,2770.67 3428,2770.67
  region net A2: 3399.77,2755.67 3383.23,2755.67 3386.5,2770.67 3396.5,2770.67
  region net A3: 3368.27,2755.67 3351.73,2755.67 3355,2768 3365,2768
  region net A4: 3335.62,2713.41 3321.38,2705.02 3331.66,2693.67 3340.56,2698.91
  region net A5: 3305.28,2709.21 3288.74,2709.21 3292.01,2694.21 3302.01,2694.21
  region net AREF: 3273.78,2755.67 3257.24,2755.66 3260.5,2770.67 3270.5,2770.67
  region net D7: 3116.05,2675.57 3112.61,2659.39 3098.6,2665.6 3100.72,2675.6
  region net D-: 3160.91,2596.22 3160.67,2612.76 3175.71,2609.71 3175.86,2599.71
  region net UCAP: 3160.79,2501.73 3160.79,2518.27 3175.79,2515 3175.79,2505
  region net +5V: 3114.33,2470.23 3114.33,2486.77 3091.83,2486 3091.83,2471
  region net +5V: 3160.97,2470.24 3160.61,2486.77 3183.12,2486.48 3183.44,2471.48
  region net RX1: 3114.34,2438.74 3114.33,2455.28 3099.33,2452 3099.33,2442
  region net SCK: 3114.34,2407.24 3114.33,2423.78 3099.33,2420.5 3099.33,2410.5
  region net MOSI: 3160.8,2392.29 3160.78,2375.75 3175.78,2379 3175.8,2389
  region net MISO: 3114.34,2344.25 3114.32,2360.79 3099.32,2357.5 3099.34,2347.5
  region net IO11*: 3194.25,2275.1 3194.25,2300.1 3182.6,2292.6 3182.6,2282.6
  region net RESET: 3242.25,2263.54 3225.75,2265.13 3218,2252.27 3227.13,2247.26
  region net +5V: 3273.77,2310.56 3257.24,2311.01 3258.62,2333.48 3273.62,2333.08
  region net XTAL2: 3336.77,2264.33 3320.23,2264.33 3321,2241.83 3336,2241.83
  region net XTAL1: 3368.27,2264.27 3351.73,2264.39 3352.34,2241.88 3367.34,2241.78
  region net D3/SCL: 3399.77,2264.33 3383.23,2264.33 3386.5,2249.33 3396.5,2249.33
  region net D2/SDA: 3431.26,2310.78 3414.72,2310.79 3418,2325.79 3428,2325.79
  region net D0/RX: 3462.76,2264.58 3446.23,2264.08 3449.95,2249.19 3459.95,2249.49
  region net D1/TXT: 3493.54,2267.69 3478.43,2260.97 3487.18,2248.45 3496.97,2252.8
  region net TX1: 3525.75,2291.79 3525.75,2266.79 3530.3,2281.8 3526.75,2271.18
  region net +5V: 3605.68,2392.29 3605.66,2375.75 3628.16,2376.5 3628.18,2391.5
  region net D4*: 3560.59,2423.66 3557.84,2407.36 3543.58,2413 3545.26,2423
  region net D6*: 3559.21,2470.23 3559.21,2486.77 3544.21,2483.5 3544.21,2473.5
  region net IO8: 3559.21,2501.73 3559.21,2518.27 3544.21,2515 3544.21,2505
  region net IO9*: 3559.21,2533.23 3559.21,2549.77 3544.21,2546.5 3544.21,2536.5
  region net IO10*: 3559.77,2581.24 3558.66,2564.74 3543.91,2569 3544.58,2579
  region net D5*: 3559.5,2612.75 3558.93,2596.23 3544.05,2600 3544.39,2610
  region net IO13: 3559.23,2644.25 3559.2,2627.71 3544.21,2631 3544.22,2641
  region net HWB: 3605.68,2659.21 3605.66,2675.75 3627.49,2675 3627.51,2660
  region net +5V: 3525.75,2755.66 3509.21,2755.68 3510,2778.18 3525,2778.16
  region net +5V: 3525.75,2751.15 3525.75,2713.65 3548.25,2724.9 3548.25,2739.9
  region net +5V: 3525.75,2709.22 3509.21,2709.2 3510,2693.49 3525,2693.51
  region net A0: 3462.76,2755.66 3446.22,2755.67 3449.5,2770.67 3459.5,2770.67
  region net A1: 3431.26,2755.66 3414.72,2755.67 3418,2770.67 3428,2770.67
  region net A2: 3399.77,2755.67 3383.23,2755.67 3386.5,2770.67 3396.5,2770.67
  region net A3: 3368.27,2755.67 3351.73,2755.67 3355,2768 3365,2768
  region net A4: 3335.62,2713.41 3321.38,2705.02 3331.66,2693.67 3340.56,2698.91
  region net A5: 3305.28,2709.21 3288.74,2709.21 3292.01,2694.21 3302.01,2694.21
  region net AREF: 3273.78,2755.67 3257.24,2755.66 3260.5,2770.67 3270.5,2770.67
Bottom Layer:
  region net IO9*: 3918.57,2901.97 3951.97,2868.57 3923.21,2866.14 3916.14,2873.22
  region net IO10*: 3818.57,2901.97 3851.97,2868.57 3823.21,2866.14 3816.14,2873.21
  region net D5*: 3718.57,2898.03 3751.97,2931.43 3723.22,2933.86 3716.14,2926.79
  region net IO13: 3678.98,2887.66 3634.14,2872.79 3658.5,2857.64 3668.5,2860.96
  region net A1: 3418.57,2901.97 3451.97,2868.57 3425.54,2868.46 3418.47,2875.53
  region net A5: 3078.61,2886.83 3033.36,2873.26 3057.21,2858.56 3066.79,2861.44
  region net +5V: 2518.57,2901.97 2551.97,2868.57 2524.98,2864.38 2514.38,2874.98
  region net IO11*: 2748.03,2068.57 2781.43,2101.97 2783.86,2073.21 2776.79,2066.14
  region net MISO: 2648.03,2131.43 2681.43,2098.03 2683.86,2126.79 2676.79,2133.86
  region net MOSI: 2548.03,2068.57 2581.43,2101.97 2583.86,2073.21 2576.79,2066.14
  region net SCK: 2448.03,2131.43 2481.43,2098.03 2483.86,2126.79 2476.79,2133.86
  region net RX1: 2377.66,2084.94 2361.48,2129.33 2388.4,2119.87 2392.18,2109.5
  region net D6*: 3918.57,2101.97 3951.97,2068.57 3923.21,2066.14 3916.14,2073.21
  region net IO12*/PD6: 3873.62,2120.83 3826.38,2120.83 3845,2142.88 3855,2142.88
  region net D4*: 3764.76,2127.83 3720.55,2111.16 3729.74,2138.19 3740.01,2142.06
  region net D2/SDA: 3248.03,2131.43 3281.43,2098.03 3283.86,2126.79 3276.78,2133.86
  region net IO9*: 3522.94,2534 3522.94,2552 3531.34,2548 3531.34,2538
  region net IO10*: 3528.19,2569.66 3519.91,2585.64 3529.1,2586.17 3533.92,2576.85
  region net D5*: 3503.06,2596 3503.06,2614 3494.66,2610 3494.66,2600
  region net D5*: 3511.75,2593.02 3499.02,2605.75 3495.91,2596.98 3502.98,2589.91
  region net IO13: 3534.08,2657.85 3521.35,2670.58 3530.12,2673.69 3537.19,2666.62
  region net A4: 3636.55,2835.92 3623.82,2848.65 3620.71,2839.88 3627.78,2832.81
  region net A4: 3467.67,2667.05 3454.95,2679.78 3463.72,2682.89 3470.79,2675.82
  region net A5: 3147.7,2755.69 3133.06,2745.22 3131.43,2754.38 3139.56,2760.2
  region net D3/SCL: 3382.36,2225.9 3382.36,2243.9 3373.96,2239.9 3373.96,2229.9
  region net MISO: 3067.06,2343.5 3067.06,2361.5 3058.66,2357.5 3058.66,2347.5
  region net MOSI: 3196.15,2364.22 3183.42,2376.95 3180.31,2368.18 3187.38,2361.11
  region net RX1: 3732.75,2535.02 3720.03,2547.75 3716.91,2538.98 3723.99,2531.91
  region net RX1: 3081.52,2435.02 3068.83,2447.78 3065.69,2439.02 3072.75,2431.93
  region net IO8: 3523.94,2502 3523.94,2520 3532.34,2516 3532.34,2506
  region net D6*: 3539.4,2387.56 3533.93,2370.41 3542.96,2371.07 3546.38,2381.8
  region net IO12*/PD6: 3548.94,2445 3548.94,2463 3557.34,2459 3557.34,2449
  region net D4*: 3504.75,2429.98 3492.02,2417.25 3488.91,2426.02 3495.98,2433.09
  region net D4*: 3495,2410.06 3513,2410.06 3509,2401.66 3499,2401.66
  region net D2/SDA: 3412.5,2331.86 3430.5,2331.86 3426.5,2323.46 3416.5,2323.46
  region net U2_4: 2519.86,2541 2519.86,2559 2511.46,2555 2511.46,2545
  region net U2_5: 2547.45,2442.98 2534.72,2430.25 2531.61,2439.02 2538.68,2446.09
  region net D+: 2922.31,2177.34 2922.16,2159.34 2930.6,2163.27 2930.68,2173.27
  region net U1_5: 2612.98,2405.15 2600.25,2417.88 2609.02,2420.99 2616.09,2413.92
  region net D+: 3258.06,2455 3258.06,2473 3250,2469 3250,2459
  region net UCAP: 3286.27,2418.07 3273,2430.23 3270.27,2421.34 3277.65,2414.58
  region net USB1_1: 2752.06,2734 2752.06,2752 2743.66,2750.5 2743.66,2735.5
  region net USB1_1: 2356.45,2732.61 2353.15,2750.3 2361.66,2750.5 2364.46,2735.5
  region net +5V: 2445.98,2468.75 2433.25,2456.02 2440.25,2451.14 2450.85,2461.75
  region net +5V: 2434.75,2479.98 2422.02,2467.25 2417.14,2474.25 2427.75,2484.86
  region net SCK: 3081.55,2396.42 3068.82,2409.15 3065.71,2400.38 3072.78,2393.31
  region net UCAP: 3054.98,2186.25 3042.25,2198.98 3051.02,2202.09 3058.09,2195.02
  region net D4*: 3349.94,2546 3349.94,2564 3358.34,2560 3358.34,2550
  region net D4*: 3091.75,2693.02 3079.02,2705.75 3075.91,2696.98 3082.98,2689.91
  region net D4*: 2779.94,2672 2779.94,2690 2788.34,2686 2788.34,2676
  region net D4*: 2784.22,2622.9 2782.02,2605.04 2774.17,2610 2775.4,2620
  region net IO11*: 3154,2260.06 3172,2260.06 3168,2253 3158,2253
  region net D5*: 3300.94,2616 3300.94,2634 3309.34,2630 3309.34,2620
  region net A0: 3445,2816.06 3463,2816.06 3459,2807.66 3449,2807.66
  region net D5*: 3233.75,2652.02 3221.02,2664.75 3217.91,2655.98 3224.98,2648.91
  region net D3/SCL: 3181.5,2087.5 3181.5,2112.5 3194.6,2105 3194.6,2095
  region net IO8: 4062.5,2131.5 4037.5,2131.5 4045,2146.5 4055,2146.5
  region net U1_5: 2604.81,2509.1 2604.81,2522.9 2617.9,2521 2617.9,2511
  region net +5V: 2581.19,2457.1 2604.81,2457.1 2600.5,2439 2585.5,2439
  region net U2_4: 2495.19,2470.9 2495.19,2457.1 2482.1,2459 2482.1,2469
  region net U2_5: 2518.81,2509.1 2518.81,2522.9 2531.9,2521 2531.9,2511
  region net A0: 2736.33,2552.5 2736.33,2577.5 2751.33,2570 2751.33,2560
  region net D4*: 2736.33,2602.5 2736.33,2627.5 2751.33,2620 2751.33,2610
  region net A1: 2974.92,2477.21 2973.72,2452.24 2989.06,2459 2989.54,2469
  region net D5*: 2974.33,2502.5 2974.33,2527.5 2989.33,2520 2989.33,2510
  region net U1_5: 2912.72,2628.78 2937.72,2628.78 2917.29,2643.78 2903.15,2643.78

## Silkscreen, mask and mechanical layers (free items; w line width, h text height)
Top Overlay:
  text "A1" at 3512.5,2880 h25 r90
  text "A4" at 3216.1,2877.52 h25 r91
  text "A3" at 3316.1,2878.4 h25 r90
  text "D7" at 2912.5,2870 h25 r90
  text "A2" at 3412.5,2870 h25 r90
  text "A0" at 3612.5,2869.78 h25 r89
  text "A5" at 3106.1,2868.4 h25 r90
  text "MIC" at 2412.5,2860 h25 r90
  text "AREF" at 3012.5,2850 h25 r90
  text "GND" at 2512.56,2829.96 h25 r90
  text "+5V" at 2613.2,2830 h25 r90
  text "GND" at 2713.19,2829.99 h25 r90
  text "GND" at 2812.5,2830 h25 r90
  text "IO13" at 3713.2,2830 h25 r90
  text "D5" at 3813.2,2830 h25 r90
  text "IO10" at 3913.2,2830 h25 r90
  text "IO9" at 4013.2,2830 h25 r90
  text "GND" at 4112.5,2830 h25 r90
  text "Ver 1.1" at 3940.31,2141.4 h35 r1
  text "IO12/PD6" at 3931.08,2090.65 h25 r93
  text "RX" at 2412.56,2079.96 h25 r90
  text "SCK" at 2512.57,2079.97 h25 r90
  text "MOSI" at 2612.57,2079.97 h25 r90
  text "MISO" at 2712.57,2079.97 h25 r90
  text "IO11" at 2812.57,2079.97 h25 r90
  text "GND" at 2912.5,2080 h25 r90
  text "+5V" at 3013.8,2080 h25 r90
  text "GND" at 3112.49,2079.99 h25 r90
  text "D3" at 3212.49,2079.99 h25 r90
  text "D2" at 3312.49,2079.99 h25 r90
  text "D0" at 3411.8,2080 h25 r90
  text "D1" at 3514.3,2080 h25 r90
  text "GND" at 3612.49,2079.99 h25 r90
  text "RESET" at 3711.8,2080 h25 r90
  text "D4" at 3811.8,2080 h25 r90
  text "D6" at 4012.5,2080 h25 r90
  text "IO8" at 4112.5,2080 h25 r90
Document:
  lines w0.1: 3124,2499 3126,2501